# Altium PCB mach_mo_rong_v2.PcbDoc (part 1 of 3)
Units mm, origin at the board's own origin, x right, y up, seen from the top; angles counter-clockwise.
Board outline 108.98 x 90.43 mm, 2 copper layers (Top Layer, Bottom Layer); 128 components, 101 nets, 811 pads, 96 vias.
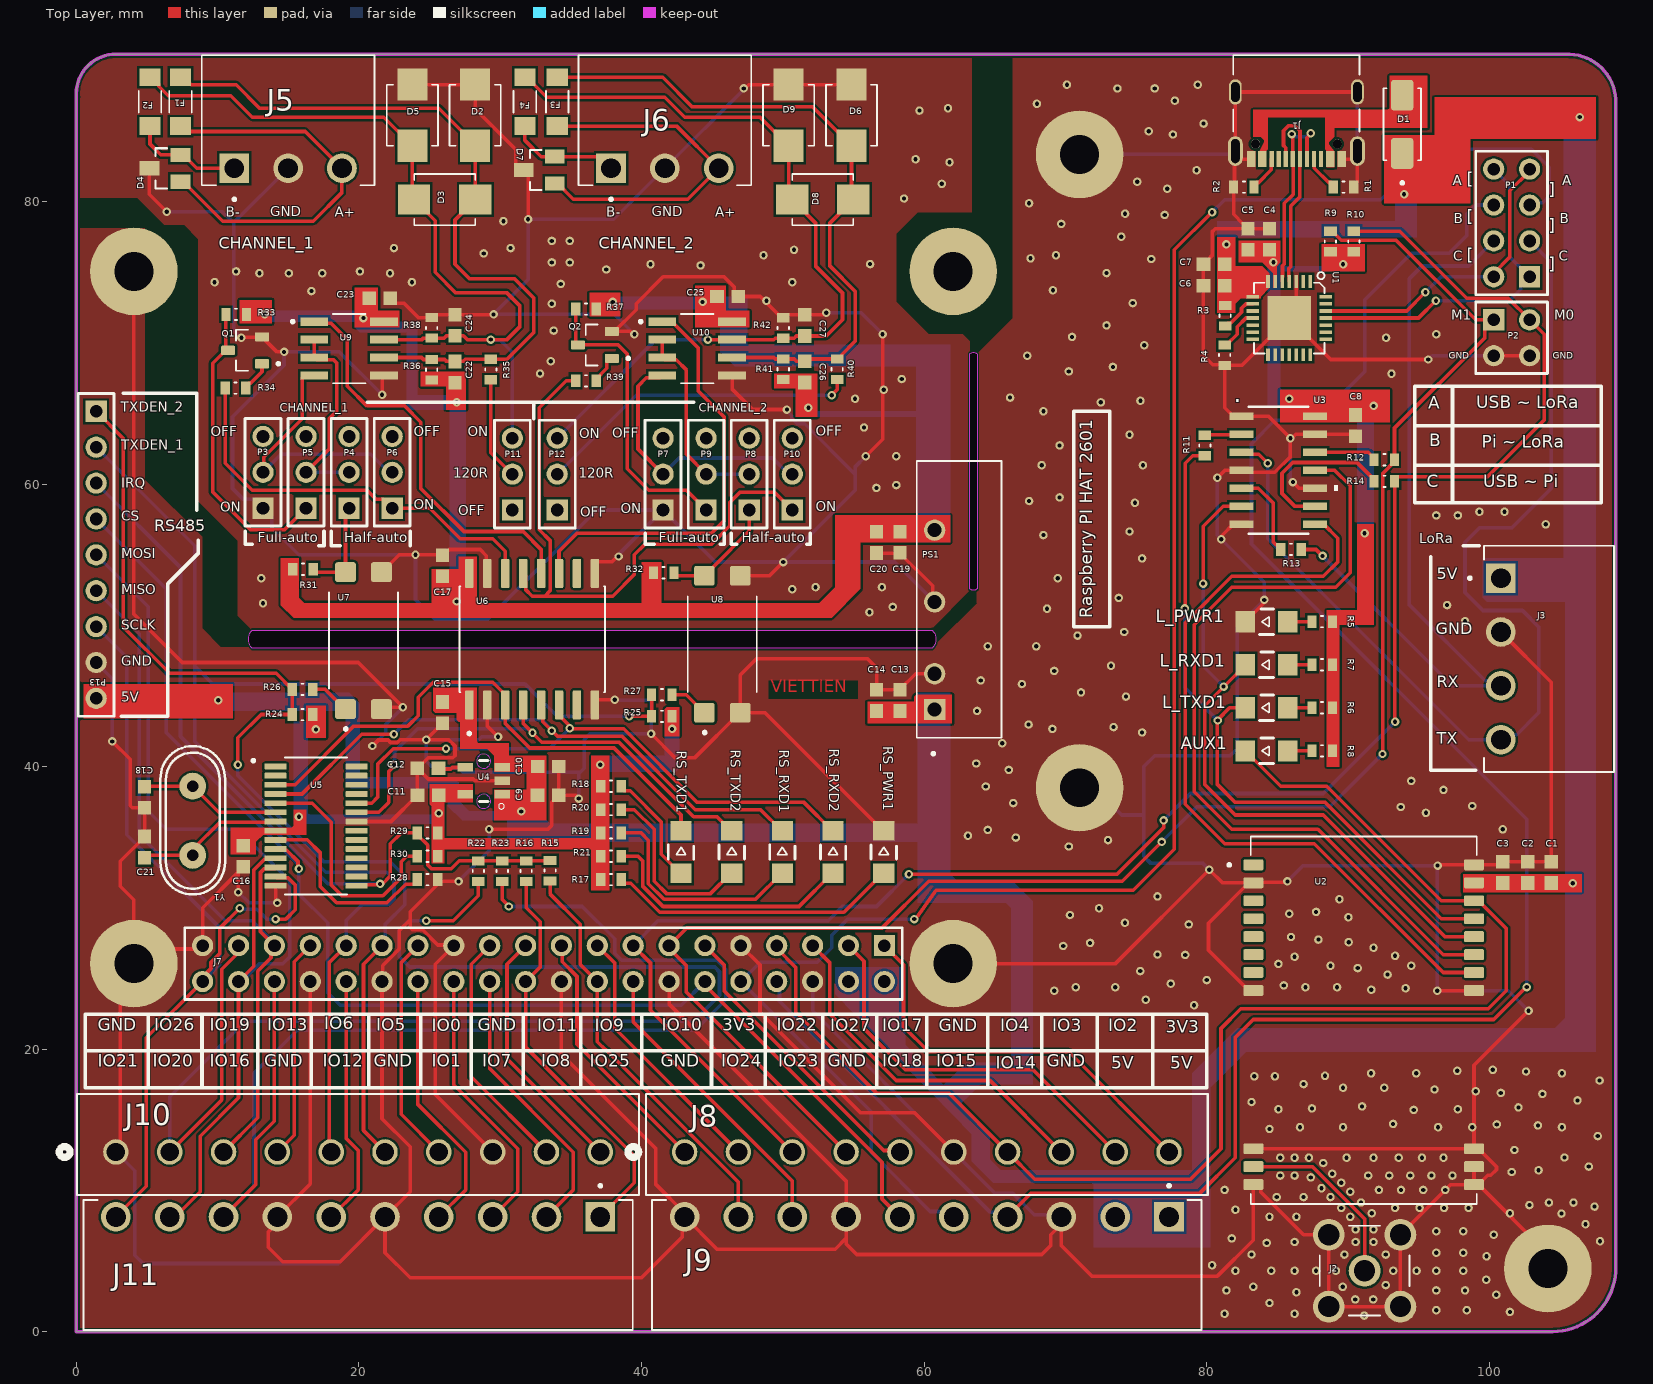
[diagram p0: Top Layer view]
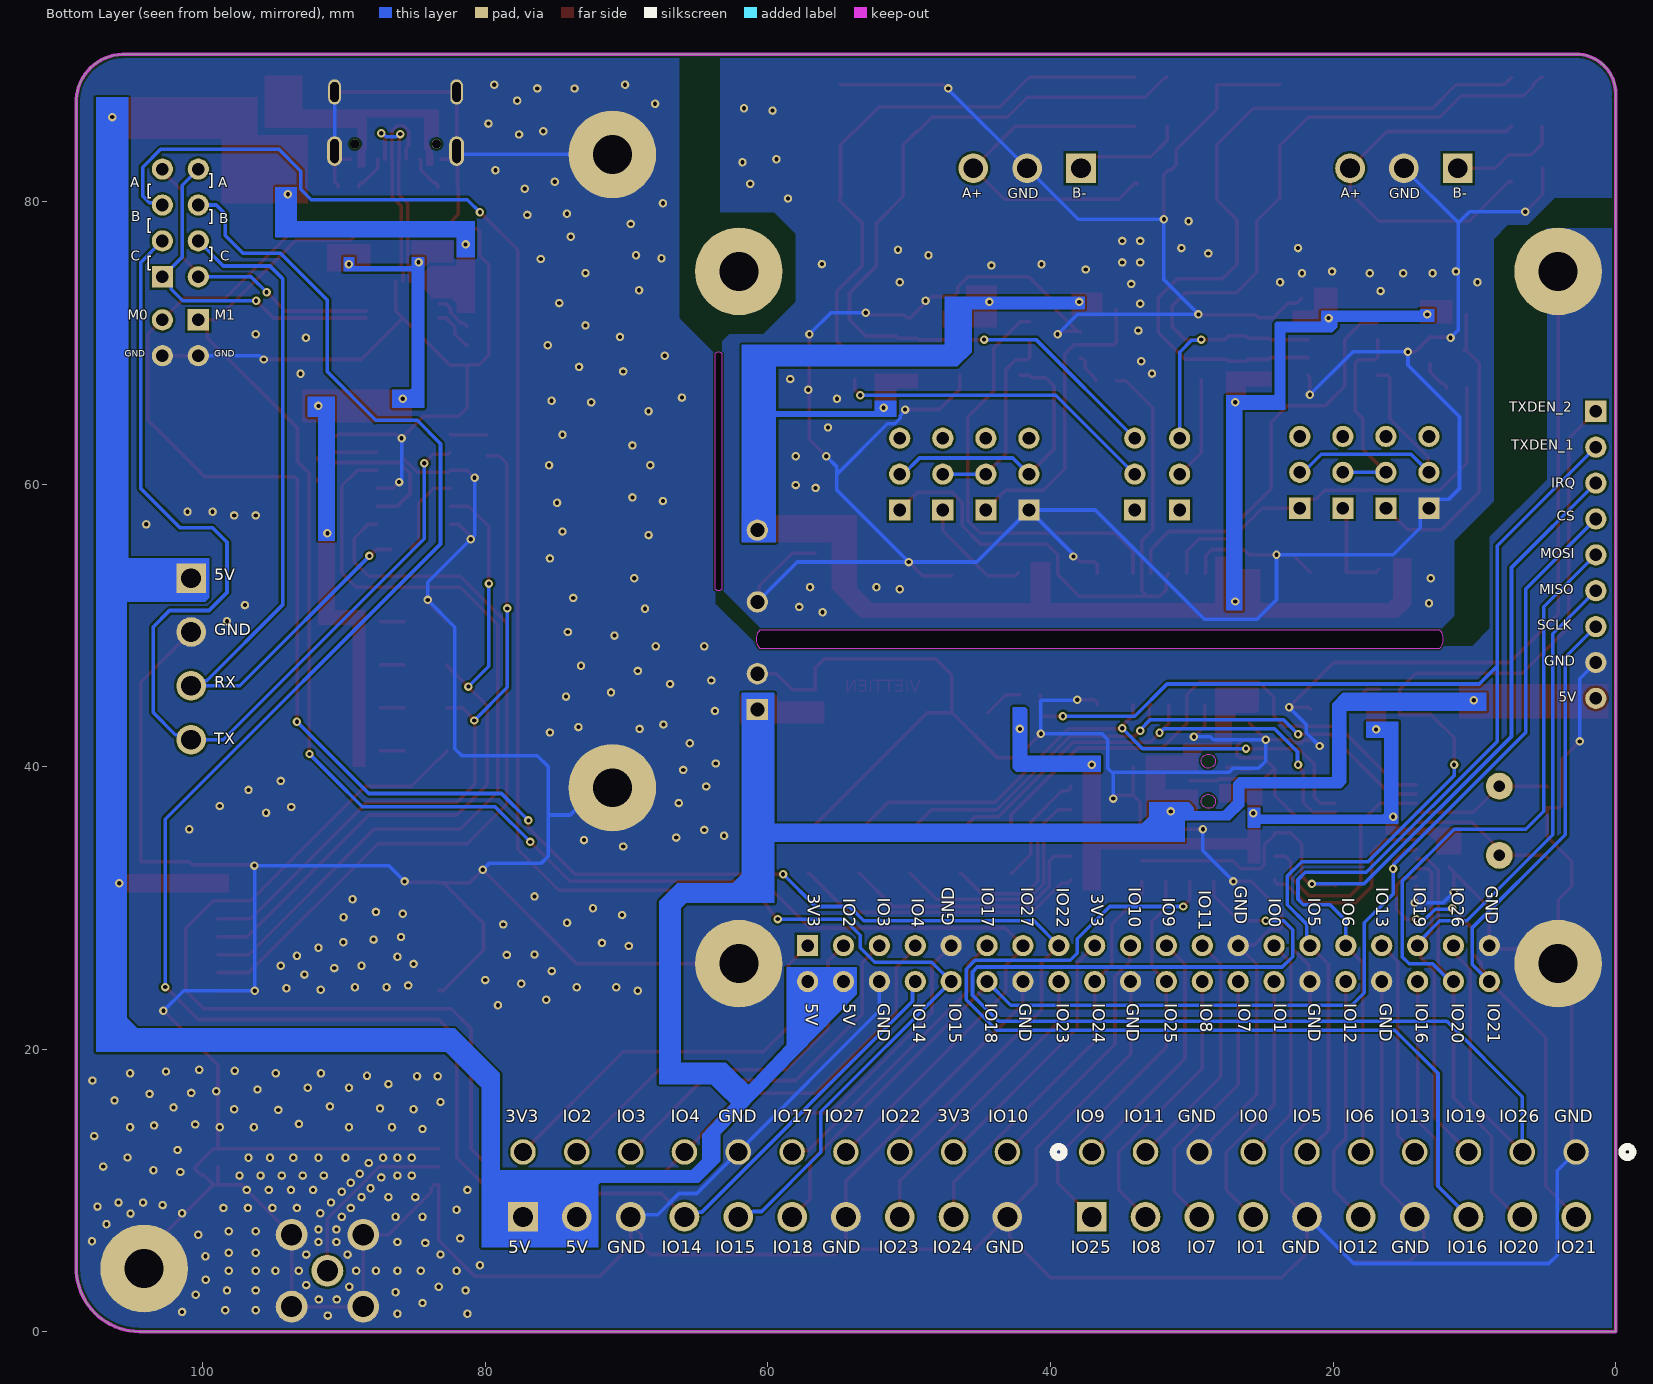
[diagram p1: Bottom Layer view, seen from below]
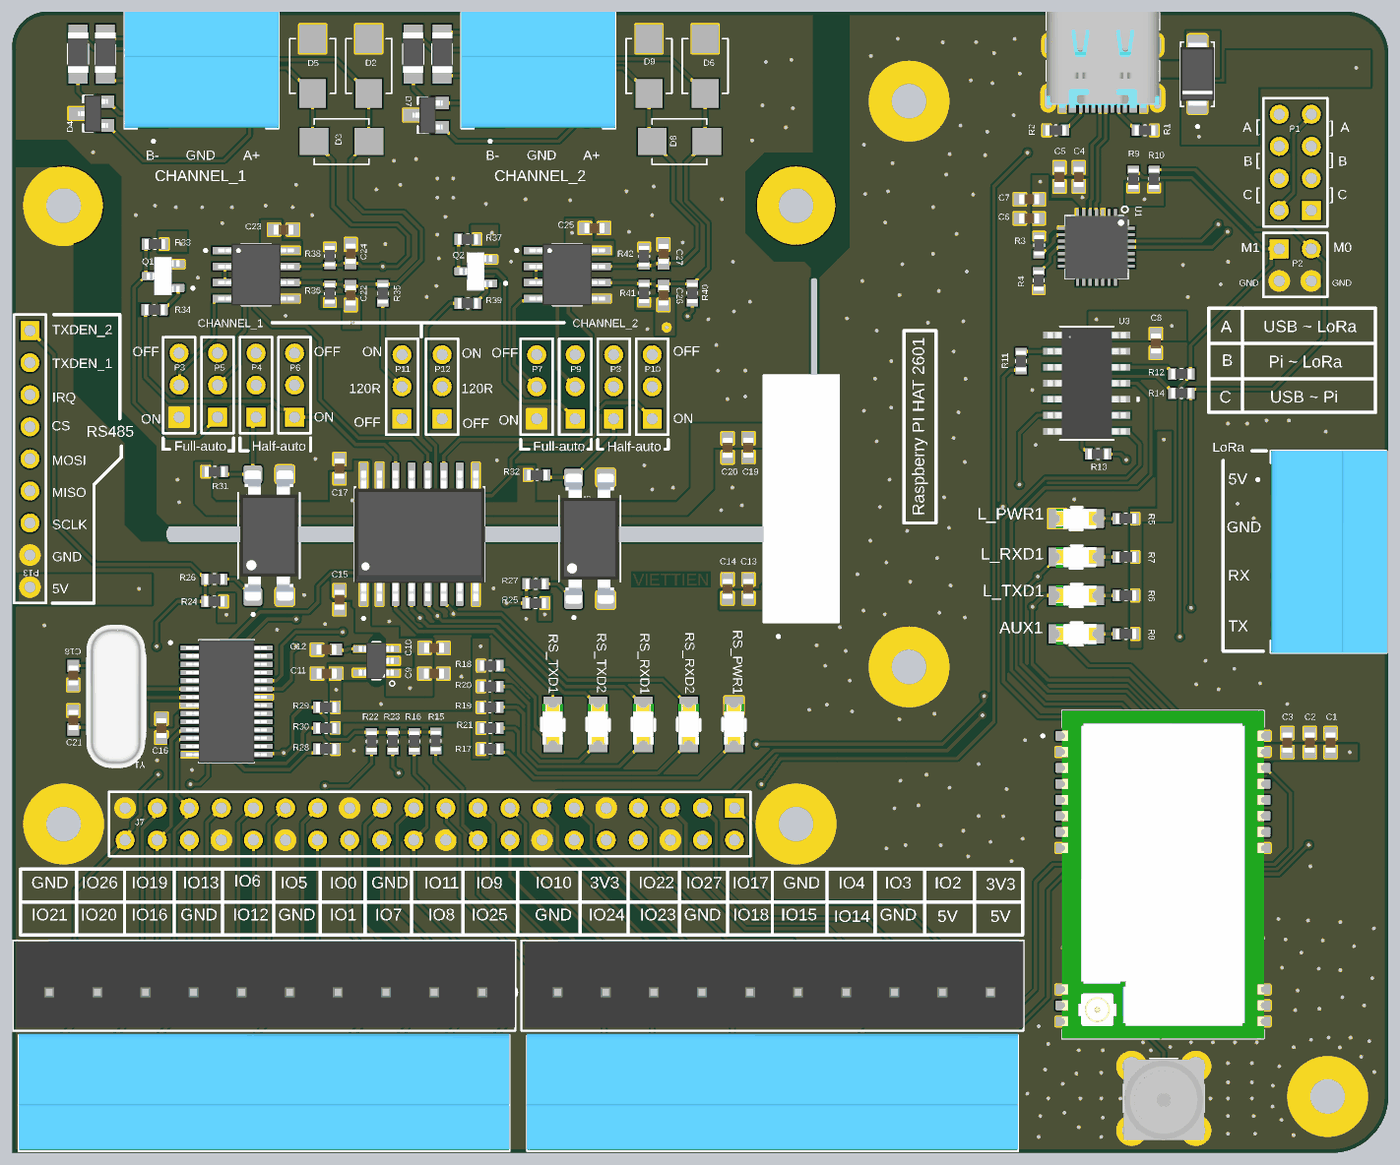
[diagram p3: 3D render of the assembled board from above, using the file's embedded part models]

## Layer stack, top to bottom
Top Solder: solder mask 0.0102, Solder Resist, Dk 3.5
Top Layer: signal copper 0.0356
Dielectric 1: dielectric 0.32, FR-4, Dk 4.8
Bottom Layer: signal copper 0.0356
Bottom Solder: solder mask 0.0102, Solder Resist, Dk 3.5

## Board outline
0,0 104.521,0 ccw(c104.457,4.508) 108.966,4.572 108.966,87.249 ccw(c105.6,87.058) 105.41,90.424 2.54,90.424 ccw(c2.794,87.63) 0,87.376
cut-out: 63.246,52.578 63.246,69.215 cw(c63.5,68.961) 63.754,69.215 63.754,52.578 cw(c63.5,52.832)
cut-out: 12.446,48.387 cw(c13.081,49.022) 12.446,49.657 60.579,49.657 cw(c59.944,49.022) 60.579,48.387

## Design rules (kind name [scope] priority, off if disabled: settings)
Clearance [All] p1: gap=0.154 ignorepadtopadclearanceinfootprint=FALSE
DiffPairsRouting [All] p1: maxlimit=0.5 minlimit=0.15 mostfreqgap=0.2 toplayer_minwidth=0.15 toplayer_maxwidth=0.387 toplayer_prefwidth=0.387 bottomlayer_minwidth=0.15 bottomlayer_maxwidth=0.387 bottomlayer_prefwidth=0.387 impedanceprofiledriven=TRUE impedanceprofileid={A8F96600-5DEE-474D-B881-1A930BE81FC2} impedanceprofilevalue=90.000000 maxuncoupledlength=12.7
HoleSize [All] p1: absolutevalues=TRUE maxlimit=10 minlimit=0.025 maxpercent=80.000 minpercent=20.000
HoleToHoleClearance [All] p1: gap=0.15 allowstackedmicrovias=TRUE
MinimumSolderMaskSliver [All] p1: minsoldermaskwidth=0.003
PolygonConnect [All] p1: connectstyle=Direct reliefconductorwidth=0.254 reliefentries=4 polygonreliefangle="90 Angle" airgapwidth=0.254
RoutingVias [All] p1: holewidth=0.3 width=0.6 viastyle="Through Hole" minholewidth=0.3 minwidth=0.6 maxholewidth=0.3 maxwidth=0.6
SilkToSilkClearance [All] p1: silktosilkclearance=0.154
SilkToSolderMaskClearance [IsPad] p1: minsilkscreentomaskgap=0.15 clearancetoexposedcopper=TRUE
SolderMaskExpansion [All] p1: expansion=0.102 istentingtop=FALSE
Width [All] p1: maxlimit=0.254 minlimit=0.254 preferedwidth=0.254
24 further rules are at their usual default settings.

## Classes and differential pairs
component class RS_485_V: C9 C10 C11 C12 C13 C14 C15 C16 C17 C18 C19 C20 C21 C22 C23 C24 C25 C26 C27 D2 D3 D4 D5 D6 D7 D8 D9 F1 F2 F3 F4 J5 J6 P3 P4 P5 P6 P7 P8 P9 P10 P11 P12 P13 PS1 Q1 Q2 R15 R16 R17 R18 R19 R20 R21 R22 R23 R24 R25 R26 R27 R28 R29 R30 R31 R32 R33 R34 R35 R36 R37 R38 R39 R40 R41 R42 RS_PWR1 RS_RXD1 RS_RXD2 RS_TXD1 RS_TXD2 U4 U5 U6 U7 U8 U9 U10 Y1
component class LoRa_V: AUX1 C1 C2 C3 C4 C5 C6 C7 C8 D1 J1 J2 J3 L_PWR1 L_RXD1 L_TXD1 P1 P2 R1 R2 R3 R4 R5 R6 R7 R8 R9 R10 R11 R12 R13 R14 U1 U2 U3
component class connect: J7 J8 J9 J10 J11
differential pair D: +D_P -D_N

## Components (designator, comment, footprint, x,y, rotation, side; value= is the part's Value field where it differs from the comment)
AUX1 "L_AUX" WL-SMCW_1206 84.245,41.117 r0 top
C1 "10uF/25V" CAPC1608X94N 104.394,32.512 r270 top
C2 "10uF/25V" CAPC1608X94N 102.743,32.512 r270 top
C3 "0.1uF" CAPC1608X94N 100.965,32.512 r270 top
C4 "4.7uF" CAPC1608X94N 84.455,77.331 r90 top
C5 "0.1uF" CAPC1608X94N 82.931,77.331 r90 top
C6 "1uF" CAPC1608X94N 80.53,74.041 r180 top
C7 "10uF/25V" CAPC1608X94N 80.53,75.565 r180 top
C8 "0.1uF" CAPC1608X94N 90.551,64.135 r90 top
C9 "0.1uF" CAPC1608X94N 33.389,37.973 r180 top
C10 "1uF" CAPC1608X94N 33.401,40.005 r180 top
C11 "0.1uF" CAPC1608X94N 24.892,37.973 r0 top
C12 "22nF" CAPC1608X94N 24.88,39.878 r0 top
C13 "1uF" CAPC1608X94N 58.293,44.692 r270 top
C14 "10uF" CAPC1608X94N 56.642,44.692 r270 top
C15 "0.1uF" CAPC1608X94N 25.908,43.827 r270 top
C16 "0.1uF" CAPC1608X94N 11.811,33.655 r270 top
C17 "0.1uF" CAPC1608X94N 25.908,54.217 r90 top
C18 "22pF" CAPC1608X94N 4.826,37.834 r90 top
C19 "0.1uF" CAPC1608X94N 58.293,55.88 r90 top
C20 "10uF" CAPC1608X94N 56.642,55.868 r90 top
C21 "22pF" CAPC1608X94N 4.826,34.302 r270 top
C22 "100pF" CAPC1608X94N 26.797,67.933 r90 top
C23 "0.1uF" CAPC1608X94N 21.475,73.152 r0 top
C24 "100pF" CAPC1608X94N 26.797,71.247 r90 top
C25 "0.1uF" CAPC1608X94N 46.101,73.279 r0 top
C26 "100pF" CAPC1608X94N 51.562,67.945 r90 top
C27 "100pF" CAPC1608X94N 51.562,71.235 r90 top
D1 "B340A-E3/61T" DIOM5126X229N 93.853,85.471 r90 top
D2 "SMBJ12CA" DIOM4336X265N 28.229,86.114 r90 top
D3 "SMBJ12CA" DIOM4336X265N 26.07,80.137 r180 top
D4 "SM712-02HTG" SOT23 6.266,82.357 r90 top
D5 "SMBJ12CA" DIOM4336X265N 23.784,86.114 r90 top
D6 "SMBJ12CA" DIOM4336X265N 54.864,86.114 r90 top
D7 "SM712-02HTG" SOT23 32.766,82.23 r90 top
D8 "SMBJ12CA" DIOM4336X265N 52.832,80.137 r180 top
D9 "SMBJ12CA" DIOM4336X265N 50.419,86.114 r90 top
F1 "Fuse Thermal" Fuse_thermal 6.223,89.736 r270 top
F2 "Fuse Thermal" Fuse_thermal 4.064,89.736 r270 top
F3 "Fuse Thermal" Fuse_thermal 32.893,89.736 r270 top
F4 "Fuse Thermal" Fuse_thermal 30.607,89.736 r270 top
J1 "TypeC_12pin_12402012E212A" TypeC_12pin_12402012E212A 86.36,87.757 r180 top locked
J2 "82_SMA-50-0-41/133_NE" HUBER+SUHNER_82_SMA-50-0-41/133_NE 91.186,4.318 r0 top
J3 "TBP02R1-381-04BE" CUI_TBP02R1-381-04BE 100.838,53.34 r270 top locked
J5 "TBP02R1-381-03BE" CUI_TBP02R1-381-03BE 11.176,82.357 r0 top locked
J6 "TBP02R1-381-03BE" CUI_TBP02R1-381-03BE 37.846,82.357 r0 top locked
J7 "" GPIO_INTERFACE 7.664,28.597 r270 top
J8 "395111010" CONN_SD-39511-001_10P_MOL 43.053,12.722 r0 top
J9 "TBP02R1-381-10BE" CUI_TBP02R1-381-10BE 77.343,8.128 r180 top
J10 "395111010" CONN_SD-39511-001_10P_MOL 2.794,12.722 r0 top
J11 "TBP02R1-381-10BE" CUI_TBP02R1-381-10BE 37.084,8.128 r180 top
L_PWR1 "L_PWR" WL-SMCW_1206 84.245,50.261 r0 top
L_RXD1 "L_RXD" WL-SMCW_1206 84.245,47.213 r0 top
L_TXD1 "L_TXD" WL-SMCW_1206 84.245,44.165 r0 top
P1 "Header 4X2" HDR2X4 102.87,74.676 r90 top
P2 "Header 2X2" HDR2X2 100.33,71.628 r270 top
P3 "Header 3" HDR1X3 13.208,58.293 r90 top
P4 "Header 3" HDR1X3 19.304,58.293 r90 top
P5 "Header 3" HDR1X3 16.256,58.293 r90 top
P6 "Header 3" HDR1X3 22.352,58.293 r90 top
P7 "Header 3" HDR1X3 41.529,58.166 r90 top
P8 "Header 3" HDR1X3 47.625,58.166 r90 top
P9 "Header 3" HDR1X3 44.577,58.166 r90 top
P10 "Header 3" HDR1X3 50.673,58.166 r90 top
P11 "Header 3" HDR1X3 30.861,58.166 r90 top
P12 "Header 3" HDR1X3 34.036,58.166 r90 top
P13 "Header 9" HDR1X9 1.397,65.151 r270 top locked
PS1 "B0505LS-1WR3" CONV_RFB-0505S 62.484,51.838 r90 top
Q1 "MMBT3904" TRANS_MMBT3904 11.938,69.469 r180 top
Q2 "MMBT3904" TRANS_MMBT3904 36.703,69.85 r180 top
R1 "5K1" RES_ERJU03J474V 89.699,81.026 r180 top
R2 "5K1" RES_ERJU03J474V 82.64,81.026 r0 top
R3 "4K7" RES_ERJU03J474V 81.315,71.919 r270 top
R4 "10K" RES_ERJU03J474V 81.28,69.125 r270 top
R5 "1K" RES_ERJU03J474V 88.182,50.261 r0 top
R6 "1K" RES_ERJU03J474V 88.182,44.165 r0 top
R7 "1K" RES_ERJU03J474V 88.182,47.213 r0 top
R8 "1K" RES_ERJU03J474V 88.182,41.117 r0 top
R9 "10K" RES_ERJU03J474V 88.773,77.179 r90 top
R10 "10K" RES_ERJU03J474V 90.424,77.179 r90 top
R11 "3K3" RES_ERJU03J474V 79.883,62.738 r90 top
R12 "3K3" RES_ERJU03J474V 92.583,61.722 r0 top
R13 "3K3" RES_ERJU03J474V 85.979,55.372 r180 top
R14 "3K3" RES_ERJU03J474V 92.583,60.198 r0 top
R15 "0R" RES_ERJU03J474V 33.528,32.639 r270 top
R16 "NC" RES_ERJU03J474V 31.835,32.602 r270 top
R17 "1K" RES_ERJU03J474V 37.846,32.004 r180 top
R18 "1K" RES_ERJU03J474V 37.846,38.608 r180 top
R19 "1K" RES_ERJU03J474V 37.846,35.306 r180 top
R20 "1K" RES_ERJU03J474V 37.846,36.957 r180 top
R21 "1K" RES_ERJU03J474V 37.846,33.655 r180 top
R22 "NC" RES_ERJU03J474V 28.448,32.602 r270 top
R23 "NC" RES_ERJU03J474V 30.141,32.602 r270 top
R24 "4.7K" RES_ERJU03J474V 16.002,43.688 r180 top
R25 "4.7K" RES_ERJU03J474V 41.439,43.561 r180 top
R26 "200R" RES_ERJU03J474V 16.002,45.466 r180 top
R27 "200R" RES_ERJU03J474V 41.439,45.085 r180 top
R28 "1K" RES_ERJU03J474V 24.855,32.004 r180 top
R29 "1K" RES_ERJU03J474V 24.855,35.306 r0 top
R30 "10K" RES_ERJU03J474V 24.855,33.655 r180 top
R31 "4.7K" RES_ERJU03J474V 16.039,53.975 r0 top
R32 "4.7K" RES_ERJU03J474V 41.566,53.721 r0 top
R33 "4.7K" RES_ERJU03J474V 11.303,72.009 r0 top
R34 "1K" RES_ERJU03J474V 11.266,66.802 r0 top
R35 "120R" RES_ERJU03J474V 29.337,68.109 r270 top
R36 "10K" RES_ERJU03J474V 25.146,68.094 r90 top
R37 "4.7K" RES_ERJU03J474V 36.068,72.39 r0 top
R38 "10K" RES_ERJU03J474V 25.146,71.062 r90 top
R39 "1K" RES_ERJU03J474V 36.068,67.31 r0 top
R40 "120R" RES_ERJU03J474V 53.848,68.13 r270 top
R41 "10K" RES_ERJU03J474V 50.038,68.13 r90 top
R42 "10K" RES_ERJU03J474V 50.038,71.05 r90 top
RS_PWR1 "L_PWR1" WL-SMCW_1206 57.15,33.96 r270 top
RS_RXD1 "L_RXD1" WL-SMCW_1206 49.974,33.96 r270 top
RS_RXD2 "L_RXD2" WL-SMCW_1206 53.562,33.96 r270 top
RS_TXD1 "L_TXD1" WL-SMCW_1206 42.799,33.96 r270 top
RS_TXD2 "L_TXD2" WL-SMCW_1206 46.387,33.96 r270 top
U1 "INTERFACE-CP2102-GMR(QFN28)" QFN28G_0.5-5X5MM 85.852,71.755 r270 top
U2 "E32-433T20S" MODULE_E32-433T20S 91.123,22.044 r0 top
U3 "74HC125D" SOT108-1_NEX 85.09,60.982 r0 top
U4 "RT9193-33GB" SOT23-5_TEXAS_INSTRUMETNS 28.829,38.989 r180 top
U5 "SC16IS752IPW,128" SOP65P640X110-28N 16.967,35.788 r0 top
U6 "ADUM1412ARWZ" SOIC127P1032X265-16N 32.258,49.022 r90 top
U7 "EL817(S1)(C)(TU)-VG" SOIC254P1030X390-4N_EL817(S1)(C)(TU)-VG 20.32,48.917 r90 top
U8 "EL817(S1)(C)(TU)-VG" SOIC254P1030X390-4N_EL817(S1)(C)(TU)-VG 45.72,48.663 r90 top
U9 "SP3485EN-L" SOIC127P599X175-8N 19.304,69.596 r0 top
U10 "SP3485EN-L" SOIC127P599X175-8N 43.942,69.596 r0 top
Y1 "14.7456MHz" CRY_HC_49_S 8.255,38.608 r270 top

## Footprints (in the part's own frame and the unit in brackets; to place one, negate y for a bottom-side part, rotate by r counter-clockwise, add the part's x,y. Pads: shape width x height; smd on the part's side, far side on the other; paste and mask are expansions set on the pad)
CAPC1608X94N [mm]
  rect 0.97x0.94 smd paste+0 mask+0.102: 1(-0.75,0) 2(0.75,0)
  body extent -0.8,-0.4 0.8,0.4, height 0.94
CONN_SD-39511-001_10P_MOL [mil]
  round 71 hole 51 mask+4.02: 1(0,0) 2(150,0) 3(300,0) 4(450,0) 5(600,0) 6(750,0) 7(900,0) 8(1050,0) 9(1200,0) 10(1350,0)
  silkscreen extent -158,-120 1458,162, body extent -97,-110 1457,160, height 360
CONV_RFB-0505S [mm]
  rect 1.508x1.508 / inner round 1.508 / far side rect 1.508x1.508 hole 1: 1(-7.8,1.73)
  round 1.508 hole 1: 2(-5.26,1.73) 4(-0.18,1.73) 6(4.9,1.73)
  silkscreen extent -11.02,-3 9.8,3, body extent -9.8,-3 9.8,3, height 9.7
CRY_HC_49_S [mm]
  round 1.905 hole 0.8: 1(-0.008,-0.023) 2(4.892,-0.023)
  silkscreen extent -2.84,-2.31 7.66,2.26, body extent -3.23,-2.39 8.12,2.26, height 3.5
CUI_TBP02R1-381-03BE [mm]
  rect 2.1x2.1 / inner round 2.1 / far side rect 2.1x2.1 hole 1.4: 1(0,0)
  round 2.1 hole 1.4: 2(3.81,0) 3(7.62,0)
  silkscreen extent -2.3,-2.3 9.92,8, body extent -2.3,-1.14 9.92,8.06, height 7.4
CUI_TBP02R1-381-04BE [mm]
  rect 2.1x2.1 / inner round 2.1 / far side rect 2.1x2.1 hole 1.4: 1(0,0)
  round 2.1 hole 1.4: 2(3.81,0) 3(7.62,0) 4(11.43,0)
  silkscreen extent -2.3,-2.3 13.73,8, body extent -2.3,-1.14 13.73,8.06, height 7.4
CUI_TBP02R1-381-10BE [mm]
  rect 2.1x2.1 / inner round 2.1 / far side rect 2.1x2.1 hole 1.4: 1(0,0)
  round 2.1 hole 1.4: 2(3.81,0) 3(7.62,0) 4(11.43,0) 5(15.24,0) 6(19.05,0) 7(22.86,0) 8(26.67,0) 9(30.48,0) 10(34.29,0)
  silkscreen extent -2.3,-2.3 36.59,8, body extent -2.3,-1.33 36.59,7.87, height 7.4
DIOM4336X265N [mm]
  rect 2.28x2.12 smd: 1(-2.165,0) 2(2.165,0)
  silkscreen extent -2.16,-1.81 2.16,1.81
DIOM5126X229N [mm]
  rrect25% 2.17x1.57 smd: A(2.065,0) C(-2.065,0)
  silkscreen extent -4.25,-1.33 2.55,1.33, body extent -2.55,-1.33 2.55,1.33, height 2.29
Fuse_thermal [mm]
  rect 1.25x1.5 smd: 1(0.942,1.143) 2(4.392,1.143)
  silkscreen extent 1.89,0.34 3.45,1.94, body extent 0.94,0.34 4.14,1.94, height 0.6
GPIO_INTERFACE [mm]
  rect 1.5x1.5 hole 0.9: 1(1.27,49.53)
  round 1.5 hole 0.9: 2(3.81,49.53) 3(1.27,46.99) 4(3.81,46.99) 5(1.27,44.45) 6(3.81,44.45) 7(1.27,41.91) 8(3.81,41.91) 9(1.27,39.37) 10(3.81,39.37) 11(1.27,36.83) 12(3.81,36.83) 13(1.27,34.29) 14(3.81,34.29) 15(1.27,31.75) 16(3.81,31.75) 17(1.27,29.21) 18(3.81,29.21) 19(1.27,26.67) 20(3.81,26.67) 21(1.27,24.13) 22(3.81,24.13) 23(1.27,21.59) 24(3.81,21.59) 25(1.27,19.05) 26(3.81,19.05) 27(1.27,16.51) 28(3.81,16.51) 29(1.27,13.97) 30(3.81,13.97) 31(1.27,11.43) 32(3.81,11.43) 33(1.27,8.89) 34(3.81,8.89) 35(1.27,6.35) 36(3.81,6.35) 37(1.27,3.81) 38(3.81,3.81) 39(1.27,1.27) 40(3.81,1.27)
  silkscreen extent 0,0 5.08,50.8
HDR1X3 [mm] "Connector; Header; 3 Position"
  rect 1.5x1.5 hole 0.9: 1(0,0)
  round 1.5 hole 0.9: 2(2.54,0) 3(5.08,0)
  silkscreen extent -1.27,-1.27 6.35,1.27
HDR1X9 [mm] "Connector; Header; 9 Position"
  rect 1.5x1.5 hole 0.9: 1(0,0)
  round 1.5 hole 0.9: 2(2.54,0) 3(5.08,0) 4(7.62,0) 5(10.16,0) 6(12.7,0) 7(15.24,0) 8(17.78,0) 9(20.32,0)
  silkscreen extent -1.27,-1.27 21.59,1.27
HDR2X2 [mm] "Connector; Header; 2x2 Position"
  rect 1.5x1.5 hole 0.9: 1(0,0)
  round 1.5 hole 0.9: 2(0,2.54) 3(2.54,0) 4(2.54,2.54)
  silkscreen extent -1.27,-1.27 3.81,3.81
HDR2X4 [mm] "Connector; Header; 4x2 Position"
  rect 1.5x1.5 hole 0.9: 1(0,0)
  round 1.5 hole 0.9: 2(0,2.54) 3(2.54,0) 4(2.54,2.54) 5(5.08,0) 6(5.08,2.54) 7(7.62,0) 8(7.62,2.54)
  silkscreen extent -1.27,-1.27 8.89,3.81
HUBER+SUHNER_82_SMA-50-0-41/133_NE [mm]
  round 2.25 hole 1.5: 1(0,0) G1(-2.54,2.54) G2(2.54,2.54) G3(-2.54,-2.54) G4(2.54,-2.54)
  silkscreen extent -3.17,-3.17 3.17,3.17, body extent -3.17,-3.3 3.17,3.05, height 9.6
MODULE_E32-433T20S [mm]
  rrect25% 1.41x0.77 smd: 1(-7.81,11) 2(-7.81,9.73) 3(-7.81,8.46) 4(-7.81,7.19) 5(-7.81,5.92) 6(-7.81,4.65) 7(-7.81,3.38) 8(-7.81,2.11) 11(-7.81,-9.09) 12(-7.81,-10.36) 13(-7.81,-11.63) 14(7.81,-11.63) 15(7.81,-10.36) 16(7.81,-9.09) 19(7.81,2.11) 20(7.81,3.38) 21(7.81,4.65) 22(7.81,5.92) 23(7.81,7.19) 24(7.81,8.46) 25(7.81,9.73) 26(7.81,11)
  silkscreen extent -9.61,-13 8,13, body extent -8,-13 8,13, height 3.25
QFN28G_0.5-5X5MM [mm]
  rect 0.9x0.254 smd: 1(-2.59,1.5) 2(-2.59,1) 3(-2.59,0.5) 4(-2.59,0) 5(-2.59,-0.5) 6(-2.59,-1) 7(-2.59,-1.5) 15(2.59,-1.5) 16(2.59,-1) 17(2.59,-0.5) 18(2.59,0) 19(2.59,0.5) 20(2.59,1) 21(2.59,1.5)
  rect 0.254x0.9 smd: 8(-1.5,-2.59) 9(-1,-2.59) 10(-0.5,-2.59) 11(0,-2.59) 12(0.5,-2.59) 13(1,-2.59) 14(1.5,-2.59) 22(1.5,2.59) 23(1,2.59) 24(0.5,2.59) 25(0,2.59) 26(-0.5,2.59) 27(-1,2.59) 28(-1.5,2.59)
  rect 3.1x3.1 smd paste-3: 29(0,0)
  silkscreen extent -3.25,-2.5 2.5,2.5, body extent -2.5,-2.5 2.5,2.5, height 1
RES_ERJU03J474V [mm]
  rect 0.65x0.9 smd: 1(-0.725,0) 2(0.725,0)
  silkscreen extent -0.08,-0.4 0.08,0.4, body extent -0.8,-0.4 0.8,0.4, height 0.45
SOIC127P599X175-8N [mm]
  rect 1.97x0.59 smd paste+0 mask+0.102: 1(-2.47,1.905) 2(-2.47,0.635) 3(-2.47,-0.635) 4(-2.47,-1.905) 5(2.47,-1.905) 6(2.47,-0.635) 7(2.47,0.635) 8(2.47,1.905)
  silkscreen extent -4.1,-2.45 1.16,2.45, body extent -3,-2.45 3,2.45, height 1.75
SOIC127P1032X265-16N [mm]
  rrect25% 2.05x0.6 smd paste+0 mask+0.102: 1(-4.655,4.445) 2(-4.655,3.175) 3(-4.655,1.905) 4(-4.655,0.635) 5(-4.655,-0.635) 6(-4.655,-1.905) 7(-4.655,-3.175) 8(-4.655,-4.445) 9(4.655,-4.445) 10(4.655,-3.175) 11(4.655,-1.905) 12(4.655,-0.635) 13(4.655,0.635) 14(4.655,1.905) 15(4.655,3.175) 16(4.655,4.445)
  silkscreen extent -6.78,-5.15 3.75,5.15, body extent -5.29,-5.15 5.04,5.15, height 2.65
SOIC254P1030X390-4N_EL817(S1)(C)(TU)-VG [mm]
  rrect25% 1.41x1.47 smd paste+0 mask+0.102: 1(-4.85,1.27) 2(-4.85,-1.27) 3(4.85,-1.27) 4(4.85,1.27)
  silkscreen extent -6.35,-2.44 3.4,2.44, body extent -5.15,-2.29 5.15,2.29, height 3.9
SOP65P640X110-28N [mm]
  rrect25% 1.57x0.41 smd: 1(-2.87,4.225) 2(-2.87,3.575) 3(-2.87,2.925) 4(-2.87,2.275) 5(-2.87,1.625) 6(-2.87,0.975) 7(-2.87,0.325) 8(-2.87,-0.325) 9(-2.87,-0.975) 10(-2.87,-1.625) 11(-2.87,-2.275) 12(-2.87,-2.925) 13(-2.87,-3.575) 14(-2.87,-4.225) 15(2.87,-4.225) 16(2.87,-3.575) 17(2.87,-2.925) 18(2.87,-2.275) 19(2.87,-1.625) 20(2.87,-0.975) 21(2.87,-0.325) 22(2.87,0.325) 23(2.87,0.975) 24(2.87,1.625) 25(2.87,2.275) 26(2.87,2.925) 27(2.87,3.575) 28(2.87,4.225)
  silkscreen extent -4.54,-4.85 2.2,4.85, body extent -3.2,-4.85 3.2,4.85, height 1.1
SOT23 [mm]
  rect 1x1.4 smd: 1(-0.95,-1.1) 2(0.95,-1.1) 3(0,1.1)
  silkscreen extent -1.42,-0.15 1.42,0.66, body extent -1.46,-1.31 1.46,1.06, height 1.12
SOT23-5_TEXAS_INSTRUMETNS [mm]
  rect 1.1x0.6 smd paste-0.05: 1(-1.3,0.95) 2(-1.3,0) 3(-1.3,-0.95) 4(1.3,-0.95) 5(1.3,0.95)
  Keep-Out Layer circle w0: c0,-1.4 r0.5
  Keep-Out Layer circle w0: c0,1.45 r0.5
  silkscreen extent -1.45,-1.45 0.3,2, body extent -1.4,-1.45 1.4,1.45, height 1.3
SOT108-1_NEX [mil]
  rect 67x21 smd paste+0 mask+0: 1(-102.5,150) 2(-102.5,100) 3(-102.5,50) 4(-102.5,0) 5(-102.5,-50) 6(-102.5,-100) 7(-102.5,-150) 8(102.5,-150) 9(102.5,-100) 10(102.5,-50) 11(102.5,0) 12(102.5,50) 13(102.5,100) 14(102.5,150)
  silkscreen extent -84,-177 165,177, body extent -122,-172 122,172, height 69
TRANS_MMBT3904 [mm]
  rrect25% 1x0.65 smd paste+0 mask+0.102: 1(-1.2,0.95) 2(-1.2,-0.95) 3(1.2,0)
  silkscreen extent -2.46,-1.45 0.65,1.45, body extent -1.3,-1.52 1.3,1.52, height 1.3
TypeC_12pin_12402012E212A [mm]
  rect 0.6x1.14 smd: A1_B12(-3.2,4.75) A4_B9(-2.4,4.75) B1_A12(3.2,4.75) B4_A9(2.4,4.75)
  rect 0.3x1.14 smd: A5(-1.25,4.75) A6(-0.25,4.75) A7(0.25,4.75) A8(1.25,4.75) B5(1.75,4.75) B6(0.75,4.75) B7(-0.75,4.75) B8(-1.75,4.75)
  oval 1.05x2.1 hole 0.6 slot 1.7 at 90 deg: SH1(-4.32,4.18) SH2(4.32,4.18)
  oval 0.9x1.8 hole 0.6 slot 1.4 at 90 deg: SH3(-4.32,0) SH4(4.32,0)
  round 0.65 hole 0.65 unplated: ""(-2.89,3.68) ""(2.89,3.68)
  silkscreen extent -4.47,-2.6 4.47,2.81, body extent -4.47,-2.65 4.47,4.95, height 3.15
WL-SMCW_1206 [mm]
  rect 1.4x1.5 smd: 1(-1.5,0) 2(1.5,0)
  silkscreen extent -0.5,-0.9 0.5,0.9, body extent -1.6,-0.8 1.6,0.8, height 0.68

## Part data
AUX1 L_PWR1 L_RXD1 L_TXD1 RS_PWR1 RS_RXD1 RS_RXD2 RS_TXD1 RS_TXD2: library part WL-SMCW_1206, "1206, Blue Typ.(@20mA): 470nm, 145mcd, 3.2V, 140Â° InGaN", Package="1206 Wurth Electronics", Check_prices=https://www.snapeda.com/parts/150120BS75000/Wurth+Electronics/view-part/?ref=eda, MF="Wurth Electronics", MP=150120BS75000, SnapEDA_Link=https://www.snapeda.com/parts/150120BS75000/Wurth+Electronics/view-part/?ref=snap
C1 C2 C3 C4 C5 C6 C7 C8 C9 C10 C11 C12 C13 C14 C15 C16 C17 C18 C19 C20 C21 C22 C23 C24 C25 C26 C27: library part cap_0603_VJ0603D3R9DXCAP, "cap 0603 (1608 Metric)", Package="1608 Vishay Vitramon", Check_prices=https://www.snapeda.com/parts/VJ0603D3R9DXCAP/Vishay/view-part/?ref=eda, MF="Vishay Vitramon", MP=VJ0603D3R9DXCAP, SnapEDA_Link=https://www.snapeda.com/parts/VJ0603D3R9DXCAP/Vishay/view-part/?ref=snap
D1: "Diode Schottky 40 V 3A Surface Mount DO-214AC (SMA)", Package="DO-214 Vishay Semiconductor", Check_prices=https://www.snapeda.com/parts/B340A-E3/61T/Vishay/view-part/?ref=eda, MF="Vishay Semiconductor", MP=B340A-E3/61T, SnapEDA_Link=https://www.snapeda.com/parts/B340A-E3/61T/Vishay/view-part/?ref=snap
D2 D3 D5 D6 D8 D9: library part SMBJ10CA-13-F, Package=None, Availability=Unavailable, MF="{'manufacturer': u'Diodes Incorporated'}", MP=SMBJ10CA-13-F, Price=None
D4 D7: "TVS Diode, SM712 Series, 31V Clamp, 600W Peak Pulse, Surface Mount, SOT23-3", Package="SOT-23 Littelfuse Inc.", Check_prices=https://www.snapeda.com/parts/SM712-02HTG/Littelfuse/view-part/?ref=eda, MF="Littelfuse Inc.", MP=SM712-02HTG, SnapEDA_Link=https://www.snapeda.com/parts/SM712-02HTG/Littelfuse/view-part/?ref=snap
F1 F2 F3 F4: "Fuse, Resettable, Fast Acting, 10A, Sz 1206, 0.134x0.071x0.033\", SMT, 24VDC, PCB"
J1: "USB2.0, Type C, Top mount, CH 1.68mm, Dual Row SMT", Package=None, Availability="In Stock", Check_prices=https://www.snapeda.com/parts/12402012E212A/Amphenol/view-part/?ref=eda, MF="Amphenol ICC (Commercial Products)", MP=12402012E212A, Price=None, Purchase-URL=https://pricing.snapeda.com/search/part/12402012E212A/?ref=eda, SnapEDA_Link=https://www.snapeda.com/parts/12402012E212A/Amphenol/view-part/?ref=snap
J2: "RF Connectors / Coaxial Connectors, Straight Pcb Jack", Package=None, Check_prices=https://www.snapeda.com/parts/82_SMA-50-0-41/133_NE/Huber%252BSuhner/view-part/?ref=eda, MF=HUBER+SUHNER, MP=82_SMA-50-0-41/133_NE, SnapEDA_Link=https://www.snapeda.com/parts/82_SMA-50-0-41/133_NE/Huber%252BSuhner/view-part/?ref=snap
J3 J5 J6: "2~24 Poles, Pluggable,Receptacle, Horizontal, 3.81 Pitch, Terminal Block Connector", Package=None, MF="Same Sky"
  J3: Check_prices=https://www.snapeda.com/parts/TBP02R1-381-04BE/Same+Sky/view-part/?ref=eda, MP=TBP02R1-381-04BE, SnapEDA_Link=https://www.snapeda.com/parts/TBP02R1-381-04BE/Same+Sky/view-part/?ref=snap
  J5 J6: Check_prices=https://www.snapeda.com/parts/TBP02R1-381-03BE/Same+Sky/view-part/?ref=eda, MP=TBP02R1-381-03BE, SnapEDA_Link=https://www.snapeda.com/parts/TBP02R1-381-03BE/Same+Sky/view-part/?ref=snap
J7: library part RASPBERRY_INTERFACE, "RASPBERRY_INTERFACE"
J8 J10: "Pluggable Terminal Blocks 3.81MM EURO HEADER V EADER VERT BLK 10CKT", Package=None, Check_prices=https://www.snapeda.com/parts/395111010/Molex/view-part/?ref=eda, MF=Molex, MP=395111010, SnapEDA_Link=https://www.snapeda.com/parts/395111010/Molex/view-part/?ref=snap
J9 J11: "2â€“24 Ð¿Ð¾Ð»ÑŽÑÐ°, Ð¿Ð¾Ð´ÐºÐ»ÑŽÑ‡Ð°ÐµÐ¼Ñ‹Ðµ, Ñ Ñ€Ð¾Ð·ÐµÑ‚ÐºÐ¾Ð¹, Ð³Ð¾Ñ€Ð¸Ð·Ð¾Ð½Ñ‚Ð°Ð»ÑŒÐ½Ñ‹Ðµ, Ñ ÑˆÐ°Ð³Ð¾Ð¼ 3,81, ÐºÐ»ÐµÐ¼Ð¼Ð½Ð°Ñ ÐºÐ¾Ð»Ð¾Ð´ÐºÐ°", Package=None, Check_prices=https://www.snapeda.com/parts/TBP02R1-381-10BE/Same+Sky/view-part/?ref=eda, MF="Same Sky", MP=TBP02R1-381-10BE, SnapEDA_Link=https://www.snapeda.com/parts/TBP02R1-381-10BE/Same+Sky/view-part/?ref=snap
P1: "Header, 4-Pin, Dual row", LatestRevisionDate=17-Jul-2002, LatestRevisionNote="Re-released for DXP Platform.", Publisher="Altium Limited"
P2: "Header, 2-Pin, Dual row", LatestRevisionDate=17-Jul-2002, LatestRevisionNote="Re-released for DXP Platform.", Publisher="Altium Limited"
P3 P4 P5 P6 P7 P8 P9 P10 P11 P12: "Header, 3-Pin", LatestRevisionDate=17-Jul-2002, LatestRevisionNote="Re-released for DXP Platform.", Publisher="Altium Limited"
P13: "Header, 9-Pin", LatestRevisionDate=17-Jul-2002, LatestRevisionNote="Re-released for DXP Platform.", Publisher="Altium Limited"
PS1: "1W DC/DC-Converter 'ECONOLINE' SIP7 1kV unreg", Package="SIP-6 Recom Power", Check_prices=https://www.snapeda.com/parts/RFB-0505S/Recom+Power/view-part/?ref=eda, MF="Recom Power", MP=RFB-0505S, SnapEDA_Link=https://www.snapeda.com/parts/RFB-0505S/Recom+Power/view-part/?ref=snap
Q1 Q2: "BJT, SOT-23, 40V, 200mA, NPN, 0.35W, 150Â°C", Package="SOT-23 Diotec", Check_prices=https://www.snapeda.com/parts/MMBT3904/Diotec/view-part/?ref=eda, MF="Diotec Semiconductor", MP=MMBT3904, SnapEDA_Link=https://www.snapeda.com/parts/MMBT3904/Diotec/view-part/?ref=snap
R1 R2 R3 R4 R5 R6 R7 R8 R9 R10 R11 R12 R13 R14 R15 R16 R17 R18 R19 R20 R21 R22 R23 R24 R25 R26 R27 R28 R29 R30 R31 R32 R33 R34 R35 R36 R37 R38 R39 R40 R41 R42: library part res_0603_ERJU03J474V, "0603 Anti-Sulfurated", Package="1608-2 Panasonic", Check_prices=https://www.snapeda.com/parts/ERJU03J474V/Panasonic/view-part/?ref=eda, MF=Panasonic, MP=ERJU03J474V, SnapEDA_Link=https://www.snapeda.com/parts/ERJU03J474V/Panasonic/view-part/?ref=snap
U1: "USB Bridge, USB to UART USB 2.0 UART Interface 28-QFN (5x5)", Package="VFQFN-28 Vishay Siliconix", Availability="In Stock", Check_prices=https://www.snapeda.com/parts/CP2102-GMR/Silicon+Labs/view-part/?ref=eda, MF=Silicon, MP=CP2102-GMR, Price=None, Purchase-URL=https://pricing.snapeda.com/search/part/CP2102-GMR/?ref=eda, SnapEDA_Link=https://www.snapeda.com/parts/CP2102-GMR/Silicon+Labs/view-part/?ref=snap
U2: "Wireless serial port module (UART)", Package=Package, Availability="Not in stock", Check_prices=https://www.snapeda.com/parts/E32-433T20S/EBYTE/view-part/?ref=eda, MF=EBYTE, MP=E32-433T20S, Price=None, SnapEDA_Link=https://www.snapeda.com/parts/E32-433T20S/EBYTE/view-part/?ref=snap
U3: "Description", Manufacturer_Name=Nexperia, Copyright="Copyright (C) 2025 Ultra Librarian. All rights reserved.", Manufacturer_Part_Number=74HC125D, RefDes=RefDes, Type=Type
U4: "Linear Voltage Regulator IC Positive Fixed 1 Output  300mA SOT-23-5", Package="SOT-23-5 Richtek", Check_prices=https://www.snapeda.com/parts/RT919333GB/Richtek/view-part/?ref=eda, MF="Richtek Technology Corp", MP=RT919333GB, SnapEDA_Link=https://www.snapeda.com/parts/RT919333GB/Richtek/view-part/?ref=snap
U5: "RS232, RS485 Controller - IÂ²C, SPI, UART Interface 28-TSSOP", Package="TSSOP-28 NXP USA", Check_prices=https://www.snapeda.com/parts/SC16IS752IPW,128/NXP+Semiconductors/view-part/?ref=eda, MF="NXP Semiconductors", MP=SC16IS752IPW,128, SnapEDA_Link=https://www.snapeda.com/parts/SC16IS752IPW,128/NXP+Semiconductors/view-part/?ref=snap
U6: "Quad-Channel Digital Isolator"
U7 U8: "Optoisolator Transistor Output 5000Vrms 1 Channel 4-SMD", Package="NON STANDARD-4 Everlight", Check_prices=https://www.snapeda.com/parts/EL817(S1)(A)(TU)-VG/Everlight/view-part/?ref=eda, MF="Everlight Electronics", MP=EL817(S1)(A)(TU)-VG, SnapEDA_Link=https://www.snapeda.com/parts/EL817(S1)(A)(TU)-VG/Everlight/view-part/?ref=snap
U9 U10: "1/1 Transceiver Half RS422, RS485 8-SOIC", Package=None, Check_prices=https://www.snapeda.com/parts/SP3485EN-L/MaxLinear/view-part/?ref=eda, MF="MaxLinear, Inc.", MP=SP3485EN-L, SnapEDA_Link=https://www.snapeda.com/parts/SP3485EN-L/MaxLinear/view-part/?ref=snap
Y1: library part "Thach anh", "Crystal For all Crystal 2pin."

## Free pads (board coordinates)
  round 6.2 hole 2.75: 17(4.064,26.057) 17(4.064,75.057) 17(62.064,26.057) 17(62.064,75.057) 17(71.015,38.505) 17(71.015,83.336) 17(104.162,4.469)
  round 0.6 hole 0.3 mask+0.102: 18(9.779,74.295) 18(11.302,75.057) 18(12.953,74.93) 18(13.08,53.34) 18(13.207,51.562) 18(15.038,74.928) 18(16.636,73.66) 18(17.398,74.93) 18(20.065,75.057) 18(22.2,74.925) 18(22.478,76.708) 18(23.748,74.295) 18(28.828,76.327) 18(30.225,78.613) 18(30.733,76.708) 18(32.817,67.823) 18(33.582,68.696) 18(33.654,72.771) 18(33.654,75.692) 18(33.654,77.216) 18(33.781,70.866) 18(34.289,74.168) 18(34.924,75.692) 18(34.924,77.216) 18(37.513,75.193) 18(40.639,75.565) 18(44.183,75.483) 18(48.64,76.2) 18(48.842,72.978) 18(50.671,52.562) 18(50.672,74.295) 18(50.799,76.581) 18(52.323,52.705) 18(55.117,66.04) 18(55.752,64.008) 18(56.133,50.927) 18(56.184,75.575) 18(56.628,59.73) 18(57.022,52.705) 18(57.149,66.675) 18(57.784,51.308) 18(58.038,61.976) 18(58.041,59.932) 18(58.42,67.437) 18(58.586,80.216) 18(59.405,83) 18(59.678,86.439) 18(61.261,81.253) 18(61.698,86.603) 18(61.807,82.782) 18(63.11,35.114) 18(63.698,40.222) 18(63.754,43.942) 18(64.008,46.101) 18(64.376,38.594) 18(64.512,35.52) 18(64.516,48.514) 18(65.532,41.656) 18(66.003,39.77) 18(66.094,66.124) 18(66.32,37.419) 18(66.501,34.978) 18(66.929,45.847) 18(67.31,69.088) 18(67.405,42.979) 18(67.437,58.801) 18(67.437,79.883) 18(67.54,75.979) 18(67.945,48.514) 18(67.992,86.919) 18(68.326,61.341) 18(68.453,56.388) 18(68.453,65.151) 18(68.707,51.181) 18(69.088,42.672) 18(69.123,73.719) 18(69.213,46.777) 18(69.215,24.13) 18(69.342,76.2) 18(69.469,53.34) 18(69.596,59.055) 18(69.596,62.738) 18(69.71,78.42) 18(69.85,27.305) 18(70.117,88.275) 18(70.253,34.345) 18(70.253,67.978) 18(70.33,29.495) 18(70.479,70.419) 18(70.739,24.384) 18(70.866,49.276) 18(71.112,45.254) 18(71.755,27.521) 18(72.39,29.972) 18(72.517,65.786) 18(72.92,71.233) 18(72.92,74.94) 18(73.025,34.798) 18(73.236,47.138) 18(73.372,68.294) 18(73.417,42.798) 18(73.533,24.384) 18(73.688,88.004) 18(73.787,51.943) 18(73.96,77.516) 18(74.168,49.53) 18(74.223,28.947) 18(74.231,79.144) 18(74.295,44.958) 18(74.549,56.642) 18(74.549,63.5) 18(74.773,72.815) 18(74.93,58.674) 18(75.09,81.404) 18(75.311,25.527) 18(75.316,65.898) 18(75.438,42.418) 18(75.438,54.737) 18(75.497,61.333) 18(75.587,69.831) 18(75.692,23.495) 18(75.903,84.975) 18(76.084,75.934) 18(76.327,88.011) 18(76.527,26.698) 18(76.527,30.811) 18(77.034,79.053) 18(77.214,80.907) 18(77.47,24.638) 18(77.621,84.749) 18(77.757,87.145) 18(78.486,26.67) 18(78.74,28.829) 18(79.121,23.114) 18(79.294,82.218) 18(79.375,88.265) 18(79.791,85.518) 18(80.01,24.892) 18(80.391,4.699) 18(81.28,1.27) 18(81.28,10.033) 18(81.407,2.921) 18(81.788,6.604) 18(82.042,4.318) 18(82.042,8.636) 18(83.185,5.461) 18(83.185,16.256) 18(83.312,3.175) 18(83.384,18.075) 18(84.256,6.286) 18(84.455,2.032) 18(84.455,8.128) 18(84.455,14.351) 18(84.582,4.318) 18(84.838,18.075) 18(84.963,9.525) 18(85.09,15.748) 18(85.09,26.035) 18(85.217,11.049) 18(85.217,12.319) 18(85.471,24.511) 18(85.852,29.591) 18(85.979,27.94) 18(86.233,1.27) 18(86.233,4.318) 18(86.233,6.35) 18(86.233,11.049) 18(86.233,12.319) 18(86.233,26.543) 18(86.36,2.794) 18(86.36,8.128) 18(86.614,14.478) 18(86.868,9.525) 18(86.868,17.526) 18(86.998,24.386) 18(87.249,12.319) 18(87.376,10.922) 18(87.463,15.805) 18(87.757,4.318) 18(87.757,29.718) 18(87.916,27.753) 18(88.138,10.16) 18(88.265,11.938) 18(88.385,18.11) 18(88.773,9.525) 18(88.773,25.908) 18(88.9,11.176) 18(89.154,4.318) 18(89.243,24.386) 18(89.408,30.607) 18(89.535,8.763) 18(89.535,10.541) 18(89.635,3.174) 18(89.662,14.478) 18(89.662,17.272) 18(89.762,5.46) 18(89.916,12.319) 18(90.043,29.337) 18(90.059,27.575) 18(90.17,8.128) 18(90.17,9.906) 18(90.524,2.285) 18(90.551,6.35) 18(90.551,7.239) 18(90.697,25.738) 18(90.932,9.144) 18(91.009,15.947) 18(91.159,1.142) 18(91.44,11.049) 18(91.648,18.288) 18(91.666,24.208) 18(91.694,8.382) 18(91.794,2.285) 18(91.821,6.35) 18(91.821,7.239) 18(91.821,12.319) 18(91.821,27.178) 18(92.202,10.033) 18(92.583,17.272) 18(92.683,3.301) 18(92.683,5.46) 18(92.71,70.358) 18(92.814,25.279) 18(92.932,11.049) 18(93.091,67.818) 18(93.208,14.706) 18(93.218,4.318) 18(93.345,8.763) 18(93.35,26.606) 18(93.599,12.319) 18(93.749,37.142) 18(93.768,10.033) 18(94.089,24.31) 18(94.424,11.049) 18(94.488,25.908) 18(94.488,38.989) 18(94.662,15.699) 18(94.84,18.288) 18(94.869,4.318) 18(95.081,8.763) 18(95.25,12.319) 18(95.335,10.033) 18(95.53,36.727) 18(95.917,11.049) 18(96.139,17.145) 18(96.266,1.524) 18(96.266,2.921) 18(96.266,4.318) 18(96.266,5.588) 18(96.266,7.112) 18(96.266,57.785) 18(96.266,70.612) 18(96.393,14.478) 18(96.774,12.319) 18(96.774,38.354) 18(96.816,8.763) 18(96.901,10.033) 18(97.028,51.435) 18(97.409,11.049) 18(97.748,18.465) 18(97.79,15.748) 18(97.79,57.785) 18(98.171,4.318) 18(98.171,5.588) 18(98.171,7.112) 18(98.298,2.921) 18(98.298,50.292) 18(98.425,1.524) 18(98.552,8.763) 18(98.806,14.478) 18(98.806,37.211) 18(99.06,17.018) 18(99.314,58.039) 18(99.805,3.676) 18(99.822,5.334) 18(100.266,18.536) 18(100.33,6.858) 18(100.514,2.612) 18(100.549,14.67) 18(100.833,16.905) 18(100.965,35.56) 18(101.092,58.039) 18(101.473,1.397) 18(101.473,8.382) 18(101.6,11.303) 18(101.791,12.862) 18(102.081,15.874) 18(102.616,18.415) 18(102.855,8.96) 18(103.458,14.599) 18(103.505,11.43) 18(103.777,16.834) 18(104.013,57.15) 18(104.238,9.138) 18(105.124,8.358) 18(105.156,14.478) 18(105.156,18.288) 18(105.337,12.33) 18(105.976,9.138) 18(106.259,16.373) 18(106.827,7.613) 18(107.061,11.684) 18(107.465,8.854) 18(107.696,13.843) 18(107.823,17.78) 18(107.855,6.407)

## Via types
v1: diameter 0.6, hole 0.3, Top Layer to Bottom Layer, tented both sides, 95 vias
v2: diameter 0.6, hole 0.3, Top Layer to Bottom Layer, 1 vias

## Nets (pads, with @x,y where several pads share a name; then routed paths per layer and width w, separated by ;. In a path a pad name is that pad's centre, name@x,y a point inside that pad or via, vN(x,y) a via of type N, cw(c..) or ccw(c..) an arc to the next point about the centre after c; other vN are vias at no path point)
3.3V: C4.1 C5.1 C8.2 R5.2 R6.2 R7.2 R8.2 R9.1 R10.1 U1.6 U3.14 | length 0.3
  Bottom Layer w0.254: v1(84.733,75.704) 84.742,75.695 v1@84.751,75.695 ; v1(85.852,66.04) v1@86.106,66.04
  other v1: 91.186,56.515 91.821,65.532 89.662,75.565
3V3: C11.2 C16.1 R17.2 R18.2 R19.2 R20.2 R21.2 R24.1 R25.1 R29.2 R30.1 U4.5 U5.8 | length 0.3
  Top Layer w0.254: v1@16.764,42.672 16.922,42.672 v1(16.957,42.637) ; v1@36.957,40.132 v1(37.084,40.132)
  other v1: 15.748,36.449 25.654,36.703 42.164,42.672
5VB: C17.1 C19.2 C20.2 C22.1 C23.1 C25.1 C26.1 PS1.6 R31.1 R32.1 R33.2 R36.1 R37.2 R41.1 U6.16 U9.8 U10.8 | length 0.7
  Top Layer w0.254: v1(13.335,72.009) 13.335,72.103 13.462,72.23 v1@13.462,72.263 ; v1(37.973,72.898) v1@38.1,72.898 ; v2@51.562,65.405 v2(51.816,65.405)
  other v1: 26.924,51.689 26.924,65.786 20.32,71.755 44.323,72.898
A_1: D4.1 F1.2 J5.3 | length 27.8
  Top Layer w0.254: D4.1@7.366,81.407 7.566,81.407 10.36,78.613 16.764,78.613 18.796,80.645 J5.3@18.796,82.357 16.19,84.963 7.747,84.963 F1.2@7.366,85.344
A_2: D7.1 F3.2 J6.3 | length 25.6
  Top Layer w0.254: D7.1@33.866,81.28 34.066,81.28 35.179,80.167 43.276,80.167 J6.3@45.466,82.357 42.479,85.344 F3.2@34.036,85.344
AUX: AUX1.1 J7.7 J8.7 U2.24 | length 99.1
  Top Layer w0.254: J7.7@49.574,27.327 49.574,27.134 50.927,25.781 50.927,22.606 56.642,16.891 61.744,16.891 J8.7@65.913,12.722 67.84,10.795 78.867,10.795 81.026,12.954 81.026,21.463 82.423,22.86 99.949,22.86 101.219,24.13 101.219,28.538 99.253,30.504 U2.24@98.933,30.504 96.623,30.504 88.519,38.608 85.254,38.608 83.368,40.494 83.318,40.494 82.745,41.067 AUX1.1@82.745,41.117
B_1: D4.2 F2.2 J5.1 | length 8.8
  Top Layer w0.254: F2.2@5.207,85.344 5.207,84.074 5.969,83.312 7.361,83.312 D4.2@7.366,83.307 7.566,83.307 8.516,82.357 J5.1@11.176,82.357 J5.1@10.595,82.938
B_2: D7.2 F4.2 J6.1 | length 7.9
  Top Layer w0.254: F4.2@31.75,85.344 31.75,84.328 32.898,83.18 D7.2@33.866,83.18 37.023,83.18 J6.1@37.846,82.357
CS: J7.12 J9.6 P13.4 U5.10 | length 93
  Top Layer w0.254: U5.10@14.097,34.163 14.175,34.085 14.882,34.085 15.682,33.286 15.682,32.832 v1(15.748,32.766) ; J7.12@44.494,24.787 44.494,24.525 57.023,11.996 57.023,9.398 J9.6@58.293,8.128
  Bottom Layer w0.254: P13.4@1.397,57.531 6.35,52.578 6.35,42.418 15.682,33.086 15.682,32.832 v1(15.748,32.766) 15.748,30.988 17.78,28.956 17.78,24.003 18.669,23.114 42.821,23.114 J7.12@44.494,24.787
D_N: J1.A7 J1.B7 U1.5 | length 14.3
  Top Layer w0.254: U1.5@85.352,74.345 85.352,74.668 85.375,74.691 85.375,75.453 85.498,75.576 85.498,79.871 86.133,80.506 86.133,82.984 J1.A7@86.122,82.995 ; v1(86.029,84.774) 86.029,84.68 86.106,84.603 86.106,83.011 J1.A7@86.11,83.007 ; J1.B7@87.11,83.007 87.11,84.514 87.376,84.78 v1(87.376,84.836)
  Bottom Layer w0.254: v1(86.029,84.774) 86.123,84.774 86.314,84.582 87.028,84.582 87.282,84.836 v1(87.376,84.836)
D_P: J1.A6 J1.B6 U1.4 | length 14.5
  Top Layer w0.254: J1.B6@85.61,83.007 85.598,83.019 85.598,83.82 85.448,83.97 85.448,85.015 85.788,85.355 86.27,85.355 86.614,85.011 86.614,83.011 86.587,82.984 86.587,80.318 85.952,79.683 85.952,75.388 85.829,75.265 85.829,74.691 85.852,74.668 U1.4@85.852,74.345
DI_1: P3.2 P6.2 U9.4 | length 19.1
  Top Layer w0.254: P3.2@13.208,60.833 13.257,60.882 13.257,61.898 15.976,64.617 15.976,67.523 16.144,67.691 U9.4@16.834,67.691 ; P6.2@22.352,60.833 P6.2@22.352,60.96
  Bottom Layer w0.254: P3.2@13.208,60.833 14.478,62.103 20.828,62.103 22.098,60.833 P6.2@22.352,60.833
DI_2: P7.2 P10.2 U10.4 | length 19.8
  Top Layer w0.254: P7.2@41.529,60.706 39.751,62.484 39.751,66.929 40.345,67.523 41.304,67.523 U10.4@41.472,67.691 U10.4@42.162,67.691
  Bottom Layer w0.254: P7.2@41.529,60.706 42.672,61.849 49.276,61.849 50.419,60.706 P10.2@50.673,60.706
GND: C1.1 C2.1 C3.1 C4.2 C5.2 C6.2 C7.2 C8.1 C9.1 C10.1 C11.1 C12.1 C13.1 C14.1 C15.2 C16.2 C18.1 C21.1 J1.A1_B12 J1.B1_A12 J1.SH1 J1.SH2 J1.SH3 J1.SH4 J2.G1 J2.G2 J2.G3 J2.G4 J3.2 J7.6 J7.9 J7.14 J7.20 J7.25 J7.30 J7.34 J7.39 J8.6 J9.3 J9.7 J9.10 J10.1 J10.8 J11.5 J11.7 L_PWR1.1 P2.3 P2.4 P13.8 pad.17@4.064,26.057 pad.17@4.064,75.057 pad.17@62.064,26.057 pad.17@71.015,38.505 pad.17@71.015,83.336 pad.17@104.162,4.469 pad.18@63.11,35.114 pad.18@63.698,40.222 pad.18@63.754,43.942 pad.18@64.008,46.101 pad.18@64.376,38.594 pad.18@64.512,35.52 pad.18@64.516,48.514 pad.18@65.532,41.656 pad.18@66.003,39.77 pad.18@66.32,37.419 pad.18@66.094,66.124 pad.18@66.501,34.978 pad.18@66.929,45.847 pad.18@67.31,69.088 pad.18@67.54,75.979 pad.18@67.405,42.979 pad.18@67.437,58.801 pad.18@67.437,79.883 pad.18@67.945,48.514 pad.18@67.992,86.919 pad.18@68.326,61.341 pad.18@68.453,56.388 pad.18@68.453,65.151 pad.18@68.707,51.181 pad.18@69.71,78.42 pad.18@69.85,27.305 pad.18@69.088,42.672 pad.18@69.123,73.719 pad.18@69.213,46.777 pad.18@69.215,24.13 pad.18@69.342,76.2 pad.18@69.469,53.34 pad.18@69.596,59.055 pad.18@69.596,62.738 pad.18@70.33,29.495 pad.18@70.117,88.275 pad.18@70.253,34.345 pad.18@70.253,67.978 pad.18@70.479,70.419 pad.18@70.739,24.384 pad.18@70.866,49.276 pad.18@71.112,45.254 pad.18@71.755,27.521 pad.18@72.39,29.972 pad.18@72.92,71.233 pad.18@72.92,74.94 pad.18@72.517,65.786 pad.18@73.025,34.798 pad.18@73.96,77.516 pad.18@73.236,47.138 pad.18@73.372,68.294 pad.18@73.417,42.798 pad.18@73.533,24.384 pad.18@73.688,88.004 pad.18@73.787,51.943 pad.18@74.93,58.674 pad.18@74.168,49.53 pad.18@74.223,28.947 pad.18@74.231,79.144 pad.18@74.295,44.958 pad.18@74.549,56.642 pad.18@74.549,63.5 pad.18@74.773,72.815 pad.18@75.09,81.404 pad.18@75.311,25.527 pad.18@75.316,65.898 pad.18@75.438,42.418 pad.18@75.438,54.737 pad.18@75.497,61.333 pad.18@75.587,69.831 pad.18@75.692,23.495 pad.18@75.903,84.975 pad.18@76.084,75.934 pad.18@76.327,88.011 pad.18@76.527,26.698 pad.18@76.527,30.811 pad.18@77.034,79.053 pad.18@77.47,24.638 pad.18@77.214,80.907 pad.18@77.621,84.749 pad.18@77.757,87.145 pad.18@78.74,28.829 pad.18@78.486,26.67 pad.18@79.121,23.114 pad.18@79.294,82.218 pad.18@79.375,88.265 pad.18@79.791,85.518 pad.18@80.01,24.892 pad.18@80.391,4.699 pad.18@81.28,1.27 pad.18@81.28,10.033 pad.18@81.407,2.921 pad.18@81.788,6.604 pad.18@82.042,4.318 pad.18@82.042,8.636 pad.18@83.185,5.461 pad.18@83.185,16.256 pad.18@83.312,3.175 pad.18@83.384,18.075 pad.18@84.256,6.286 pad.18@84.455,2.032 pad.18@84.455,8.128 pad.18@84.455,14.351 pad.18@84.582,4.318 pad.18@84.838,18.075 pad.18@84.963,9.525 pad.18@85.09,15.748 pad.18@85.09,26.035 pad.18@85.217,11.049 pad.18@85.217,12.319 pad.18@85.471,24.511 pad.18@85.852,29.591 pad.18@85.979,27.94 pad.18@86.36,2.794 pad.18@86.36,8.128 pad.18@86.233,1.27 pad.18@86.233,4.318 pad.18@86.233,6.35 pad.18@86.233,11.049 pad.18@86.233,12.319 pad.18@86.233,26.543 pad.18@86.614,14.478 pad.18@86.868,9.525 pad.18@86.868,17.526 pad.18@86.998,24.386 pad.18@87.249,12.319 pad.18@87.376,10.922 pad.18@87.463,15.805 pad.18@87.757,4.318 pad.18@87.757,29.718 pad.18@87.916,27.753 pad.18@88.9,11.176 pad.18@88.138,10.16 pad.18@88.265,11.938 pad.18@88.385,18.11 pad.18@88.773,9.525 pad.18@88.773,25.908 pad.18@89.154,4.318 pad.18@89.243,24.386 pad.18@89.408,30.607 pad.18@89.535,8.763 pad.18@89.535,10.541 pad.18@89.635,3.174 pad.18@89.662,14.478 pad.18@89.662,17.272 pad.18@89.762,5.46 pad.18@89.916,12.319 pad.18@90.17,8.128 pad.18@90.17,9.906 pad.18@90.043,29.337 pad.18@90.059,27.575 pad.18@90.524,2.285 pad.18@90.551,6.35 pad.18@90.551,7.239 pad.18@90.697,25.738 pad.18@90.932,9.144 pad.18@91.009,15.947 pad.18@91.44,11.049 pad.18@91.159,1.142 pad.18@91.648,18.288 pad.18@91.666,24.208 pad.18@91.694,8.382 pad.18@91.794,2.285 pad.18@91.821,6.35 pad.18@91.821,7.239 pad.18@91.821,12.319 pad.18@91.821,27.178 pad.18@92.71,70.358 pad.18@92.202,10.033 pad.18@92.583,17.272 pad.18@92.683,3.301 pad.18@92.683,5.46 pad.18@92.814,25.279 pad.18@92.932,11.049 pad.18@93.35,26.606 pad.18@93.091,67.818 pad.18@93.208,14.706 pad.18@93.218,4.318 pad.18@93.345,8.763 pad.18@93.599,12.319 pad.18@93.749,37.142 pad.18@93.768,10.033 pad.18@94.84,18.288 pad.18@94.089,24.31 pad.18@94.424,11.049 pad.18@94.488,25.908 pad.18@94.488,38.989 pad.18@94.662,15.699 pad.18@94.869,4.318 pad.18@95.25,12.319 pad.18@95.53,36.727 pad.18@95.081,8.763 pad.18@95.335,10.033 pad.18@95.917,11.049 pad.18@96.139,17.145 pad.18@96.266,1.524 pad.18@96.266,2.921 pad.18@96.266,4.318 pad.18@96.266,5.588 pad.18@96.266,7.112 pad.18@96.266,57.785 pad.18@96.266,70.612 pad.18@96.393,14.478 pad.18@96.774,12.319 pad.18@96.774,38.354 pad.18@96.816,8.763 pad.18@96.901,10.033 pad.18@97.028,51.435 pad.18@97.79,15.748 pad.18@97.79,57.785 pad.18@97.409,11.049 pad.18@97.748,18.465 pad.18@98.171,4.318 pad.18@98.171,5.588 pad.18@98.171,7.112 pad.18@98.298,2.921 pad.18@98.298,50.292 pad.18@98.425,1.524 pad.18@98.552,8.763 pad.18@98.806,14.478 pad.18@98.806,37.211 pad.18@99.06,17.018 pad.18@99.314,58.039 pad.18@99.805,3.676 pad.18@99.822,5.334 pad.18@100.33,6.858 pad.18@100.266,18.536 pad.18@100.514,2.612 pad.18@100.549,14.67 pad.18@100.833,16.905 pad.18@100.965,35.56 pad.18@101.6,11.303 pad.18@101.092,58.039 pad.18@101.473,1.397 pad.18@101.473,8.382 pad.18@101.791,12.862 pad.18@102.081,15.874 pad.18@102.616,18.415 pad.18@102.855,8.96 pad.18@103.458,14.599 pad.18@103.505,11.43 pad.18@103.777,16.834 pad.18@104.013,57.15 pad.18@104.238,9.138 pad.18@105.124,8.358 pad.18@105.156,14.478 pad.18@105.156,18.288 pad.18@105.337,12.33 pad.18@105.976,9.138 pad.18@106.259,16.373 pad.18@106.827,7.613 pad.18@107.061,11.684 pad.18@107.465,8.854 pad.18@107.696,13.843 pad.18@107.823,17.78 pad.18@107.855,6.407 PS1.2 R1.1 R2.1 R4.2 R28.1 RS_PWR1.1 U1.3 U1.29 U2.2 U2.8 U2.11 U2.13 U2.14 U2.15 U2.16 U2.19 U2.26 U3.1 U3.4 U3.7 U3.10 U3.13 U4.2 U5.14 U5.22 U6.2 U6.8 U7.2 U8.2 | length 820.4
  Top Layer w0.254: v1(2.54,41.783) 3.81,40.513 3.81,37.233 3.959,37.084 C18.1@4.826,37.084 C21.1@4.826,35.052 4.826,35.037 3.097,33.308 3.097,31.539 4.064,30.573 pad.17@4.064,26.057 ; J10.1@2.794,12.722 3.09,13.018 3.09,25.083 pad.17@4.064,26.057 ; pad.17@4.064,75.057 4.064,50.8 7.493,47.371 19.939,47.371 v1(23.114,44.196) 21.719,44.196 U7.2@21.59,44.067 ; v1(11.461,31.106) 11.461,31.903 11.468,31.91 C16.2@11.468,32.547 ; C16.2@11.811,32.905 11.468,32.562 C16.2@11.468,32.547 ; U5.14@14.097,31.563 14.097,30.574 14.224,30.447 v1(14.224,30.353) ; J7.34@16.554,24.787 16.554,10.458 J11.7@14.224,8.128 14.224,7.691 13.589,7.056 13.589,5.969 14.605,4.953 18.669,4.953 J11.5@21.844,8.128 ; U5.22@19.837,36.113 22.267,36.113 24.13,37.976 C12.1@24.13,39.878 C12.1@24.145,39.878 ; v1(20.957,41.459) 21.381,41.883 22.065,41.883 22.238,41.71 22.72,41.71 22.92,41.91 v1(24.765,41.91) ; C15.2@25.908,43.077 25.908,43.062 24.765,41.919 v1(24.765,41.91) ; v1(27.051,31.877) 25.781,31.877 23.622,29.718 23.622,29.157 ; U6.2@29.083,44.367 29.083,42.872 v1(29.845,42.11) ; v1(29.21,35.56) 33.379,35.56 33.655,35.836 33.655,37.489 33.781,37.615 33.781,37.63 34.124,37.973 C9.1@34.139,37.973 ; J10.8@29.464,12.722 25.4,16.786 25.4,26.013 J7.25@26.714,27.327 26.665,27.376 25.583,27.376 24.511,28.448 23.771,28.448 23.622,28.597 23.622,29.157 ; U4.2@30.129,38.989 28.21,38.989 28.072,39.127 24.896,39.127 C12.1@24.145,39.878 ; C10.1@34.151,40.005 34.151,37.985 C9.1@34.139,37.973 ; J7.20@34.334,24.787 34.334,19.641 41.021,12.954 41.021,10.414 43.053,8.382 J9.10@43.053,8.128 ; v1(35.564,37.738) 35.329,37.973 C9.1@34.139,37.973 ; U6.8@36.703,44.367 36.703,44.555 36.876,44.728 v1(38.099,44.728) ; v1(40.683,42.323) 42.365,40.64 43.787,40.64 46.96,43.813 U8.2@46.99,43.813 ; J7.14@41.954,24.787 41.954,23.197 54.483,10.668 J9.7@54.483,8.128 54.483,6.604 ; J7.9@47.034,27.327 48.387,25.974 48.387,22.606 55.499,15.494 59.331,15.494 J8.6@62.103,12.722 ; RS_PWR1.1@57.15,35.46 57.1,35.46 48.747,43.813 47.02,43.813 U8.2@46.99,43.813 ; PS1.2@60.754,46.578 59.414,46.578 58.293,45.457 C13.1@58.293,45.442 C14.1@56.642,45.442 56.642,46.99 56.007,47.625 48.133,47.625 46.99,46.482 U8.2@46.99,43.813 ; pad.17@62.064,26.057 73.554,26.057 v1(80.2,32.703) 81.128,31.774 U2.2@82.993,31.774 ; J9.3@69.723,8.128 J9.3@69.723,7.628 ; v1(80.772,60.452) 81.302,60.982 U3.4@82.486,60.982 82.626,60.842 83.35,60.842 83.359,60.833 84.836,60.833 85.939,61.936 v1(85.939,63.244) ; v1@81.11,56.379 81.902,57.172 U3.7@82.486,57.172 ; J1.SH2@81.977,83.375 81.977,81.088 R2.1@81.915,81.026 81.915,79.097 82.573,78.439 82.588,78.439 82.931,78.096 C5.2@82.931,78.081 ; L_PWR1.1@82.745,50.261 84.092,51.608 v1(84.092,51.797) ; J1.B1_A12@83.16,83.007 82.408,83.007 82.04,83.375 J1.SH2@82.04,83.577 J1.SH4@82.04,87.757 J1.SH3@90.68,87.757 ; U2.11@83.313,12.954 U2.16@98.933,12.954 ; U2.8@83.313,24.154 82.993,24.154 80.137,27.01 80.137,28.918 U2.2@82.993,31.774 ; C4.2@84.455,78.081 C5.2@82.931,78.081 ; v1(85.725,31.877) 85.674,31.826 83.365,31.826 U2.2@83.313,31.774 U2.2@82.993,31.774 ; v1(86.115,60.141) 86.544,59.712 U3.10@87.694,59.712 ; U1.3@86.352,74.345 86.352,72.255 U1.29@85.852,71.755 ; J1.A1_B12@89.56,83.007 90.312,83.007 J1.SH1@90.68,83.375 ; R1.1@90.424,81.026 90.424,81.151 90.68,81.407 J1.SH1@90.68,83.375 ; C8.1@90.551,63.385 90.414,63.522 U3.13@87.694,63.522 86.311,63.522 86.033,63.244 v1(85.939,63.244) ; J1.SH1@90.68,83.577 J1.SH1@90.68,83.375 ; v1(95.697,68.821) 88.786,68.821 U1.29@85.852,71.755 ; v1(96.33,24.141) 96.336,24.148 98.927,24.148 U2.19@98.933,24.154 ; v1(96.358,32.995) 96.406,33.044 U2.26@98.933,33.044 100.747,33.044 C3.1@100.965,33.262 C2.1@102.743,33.262 C1.1@104.394,33.262 104.394,45.974 J3.2@100.838,49.53 ; U2.15@98.933,11.684 U2.14@98.933,10.414 ; P2.3@100.33,69.088 P2.4@102.87,69.088 ; v1(102.796,22.713) 98.933,18.849 U2.16@98.933,12.954 ; pad.17@104.162,4.469 104.162,5.505 U2.14@99.253,10.414 ; pad.17@4.064,26.057 5.096,27.089 8.696,27.089 J7.39@8.934,27.327 8.934,30.013 C16.2@11.468,32.547 ; J11.5@21.844,8.128 21.844,5.588 23.622,3.81 40.005,3.81 42.892,6.697 42.892,7.967 J9.10@43.053,8.128 ; J11.5@21.844,8.128 23.622,9.906 23.622,13.081 21.634,15.069 J7.30@21.634,24.787 21.683,24.836 21.683,25.918 22.86,27.095 22.86,28.395 23.622,29.157 ; C12.1@24.145,39.878 24.896,40.629 26.648,40.629 26.797,40.778 26.797,41.462 26.349,41.91 v1(24.765,41.91) ; J9.10@43.053,8.128 45.339,5.842 53.721,5.842 54.483,6.604 ; 54.483,6.604 54.483,6.223 55.245,5.461 68.326,5.461 68.961,6.096 68.961,6.866 J9.3@69.723,7.628 ; J9.3@69.723,7.628 69.723,6.096 71.882,3.937 80.772,3.937 83.313,6.478 U2.13@83.313,10.414 83.587,10.414 83.845,10.156 83.845,9.882 86.869,6.858 J2.G1@88.646,6.858 J2.G3@88.646,1.778 J2.G4@93.726,1.778 J2.G2@93.726,6.858 97.282,10.414 U2.14@98.933,10.414 ; R4.2@81.28,68.4 81.28,65.414 81.902,64.792 U3.1@82.486,64.792 84.391,64.792 v1(85.939,63.244) ; R4.2@81.28,68.4 82.497,68.4 U1.29@85.852,71.755 ; R4.2@81.28,68.4 81.239,68.441 80.449,68.441 79.78,69.11 C6.2@79.78,74.041 C7.2@79.78,75.565 79.795,75.565 80.138,75.908 80.138,75.923 80.391,76.176 80.391,77.851 80.621,78.081 C5.2@82.931,78.081 ; U2.14@98.933,10.414 U2.14@99.253,10.414 ; U2.16@98.933,12.954 99.253,12.954 100.523,11.684 100.523,11.474 100.122,11.073 99.912,11.073 U2.14@99.253,10.414
  Bottom Layer w0.254: P13.8@1.397,47.371 2.54,46.228 v1(2.54,41.783) ; J10.1@2.794,12.722 4.125,11.391 4.125,5.422 4.721,4.826 18.542,4.826 J11.5@21.844,8.128 ; v1(11.461,31.106) 12.214,30.353 v1(14.224,30.353) ; v1(20.957,41.459) 21.898,42.4 21.898,42.98 v1(23.114,44.196) ; v1(27.051,31.877) 29.21,34.036 v1(29.21,35.56) ; v1(29.845,42.11) 28.681,42.11 28.481,41.91 v1(24.765,41.91) 24.765,40.386 25.273,39.878 27.078,39.878 27.348,39.608 35.671,39.608 ; v1(35.564,37.738) 35.564,39.501 35.671,39.608 ; v1(38.099,44.728) 38.123,44.704 40.64,44.704 40.683,44.661 v1(40.683,42.323) 36.354,42.323 35.941,41.91 35.941,39.878 35.671,39.608 ; J7.6@52.114,24.787 52.114,22.711 J8.6@62.103,12.722 65.046,9.779 66.294,9.779 67.806,8.267 69.584,8.267 J9.3@69.723,8.128 ; pad.17@71.015,38.505 72.08,38.505 74.008,36.576 75.565,36.576 ; pad.17@71.015,83.336 81.799,83.336 J1.SH2@82.04,83.577 ; v1(80.2,32.703) 79.755,33.147 76.073,33.147 75.565,33.655 75.565,36.576 ; v1(80.772,60.452) 80.772,56.372 v1(81.043,56.101) 84.092,53.052 v1(84.092,51.797) 82.169,49.873 82.169,41.275 81.661,40.767 76.327,40.767 75.565,40.005 75.565,36.576 ; v1(85.725,31.877) 86.843,32.995 v1(96.358,32.995) 96.344,32.981 96.344,24.155 v1(96.33,24.141) 101.368,24.141 v1(102.796,22.713) ; v1(85.939,63.244) 85.939,60.316 v1(86.115,60.141) ; J1.SH1@90.68,83.577 J1.SH3@90.68,87.757 ; v1(95.697,68.821) 95.964,69.088 P2.3@100.33,69.088
IRQ: P13.3 R15.1 R16.1 R22.1 R23.1 R29.1 U5.15 | length 57.5
  Top Layer w0.254: U5.15@19.837,31.563 19.915,31.641 v1@21.491,31.641 ; v1@21.608,31.641 22.225,32.258 22.225,34.544 22.987,35.306 R29.1@24.13,35.306 24.13,35.181 24.865,34.446 24.865,33.471 24.865,33.031 25.13,32.766 26.543,32.766 27.104,33.327 R22.1@28.448,33.327 R23.1@30.141,33.327 R16.1@31.835,33.327 31.853,33.346 33.509,33.346 R15.1@33.528,33.364
  Bottom Layer w0.254: P13.3@1.397,60.071 7.366,54.102 7.366,42.137 17.804,31.699 v1(21.491,31.699)
L_RX: L_RXD1.1 U2.22 U3.6 | length 48.5
  Top Layer w0.254: v1(79.756,52.959) 79.756,57.023 81.175,58.442 U3.6@82.486,58.442 ; L_RXD1.1@82.745,47.213 82.745,47.163 81.227,45.645 79.883,44.301 79.883,38.735 82.042,36.576 88.265,36.576 96.877,27.964 U2.22@98.933,27.964
  Bottom Layer w0.254: v1(79.756,52.959) 79.756,47.116 v1(81.209,45.663)
L_TX: L_TXD1.1 R11.1 U2.23 | length 49.8
  Top Layer w0.254: v1(78.453,51.196) 78.486,51.229 78.486,61.468 79.031,62.013 R11.1@79.883,62.013 ; v1@80.772,43.265 80.772,38.735 82.042,37.465 88.392,37.465 96.623,29.234 U2.23@98.933,29.234 ; v1@80.772,43.307 81.63,44.165 L_TXD1.1@82.745,44.165
  Bottom Layer w0.254: v1(78.453,51.196) 78.453,45.609 v1(80.796,43.265)
Lo_RX: J3.3 P1.4 R13.1 | length 57.2
  Top Layer w0.254: R13.1@86.704,55.372 87.752,55.372 v1(88.21,54.914)
  Bottom Layer w0.254: v1(88.21,54.914) 97.404,45.72 J3.3@100.838,45.72 100.485,46.073 99.723,46.073 94.361,51.435 94.361,74.549 95.25,75.438 98.552,75.438 P1.4@100.33,77.216
Lo_TX: J3.4 P1.3 U3.3 | length 75
  Top Layer w0.254: U3.3@82.486,62.252 82.626,62.112 83.557,62.112 83.566,62.103 83.693,62.103 v1(84.328,61.468)
  Bottom Layer w0.254: v1(84.328,61.468) 84.328,56.134 98.552,41.91 J3.4@100.838,41.91 101.191,42.263 101.953,42.263 103.505,43.815 103.505,49.911 102.362,51.054 99.568,51.054 98.298,52.324 98.298,55.88 99.314,56.896 101.6,56.896 104.394,59.69 104.394,75.692 P1.3@102.87,77.216
M0: U2.20 U3.8 | length 54.5
  Top Layer w0.254: U3.8@87.694,57.172 88.278,57.172 89.281,56.169 89.281,54.483 88.265,53.467 81.788,53.467 78.486,50.165 78.486,37.338 81.28,34.544 87.63,34.544 96.75,25.424 U2.20@98.933,25.424
M1: U2.21 U3.11 | length 58.1